# Altium PCB BLMC-26.PcbDoc (part 2 of 2)
Units mm, origin at the board's own origin, x right, y up, seen from the top; angles counter-clockwise.
Board outline 139.57 x 72.14 mm, 4 copper layers (Top Layer, GND, POWER, Bottom Layer), stack 0.603 mm thick; 168 components, 104 nets, 514 pads, 115 vias.
Unrouted connection lines stored in the file: 49.
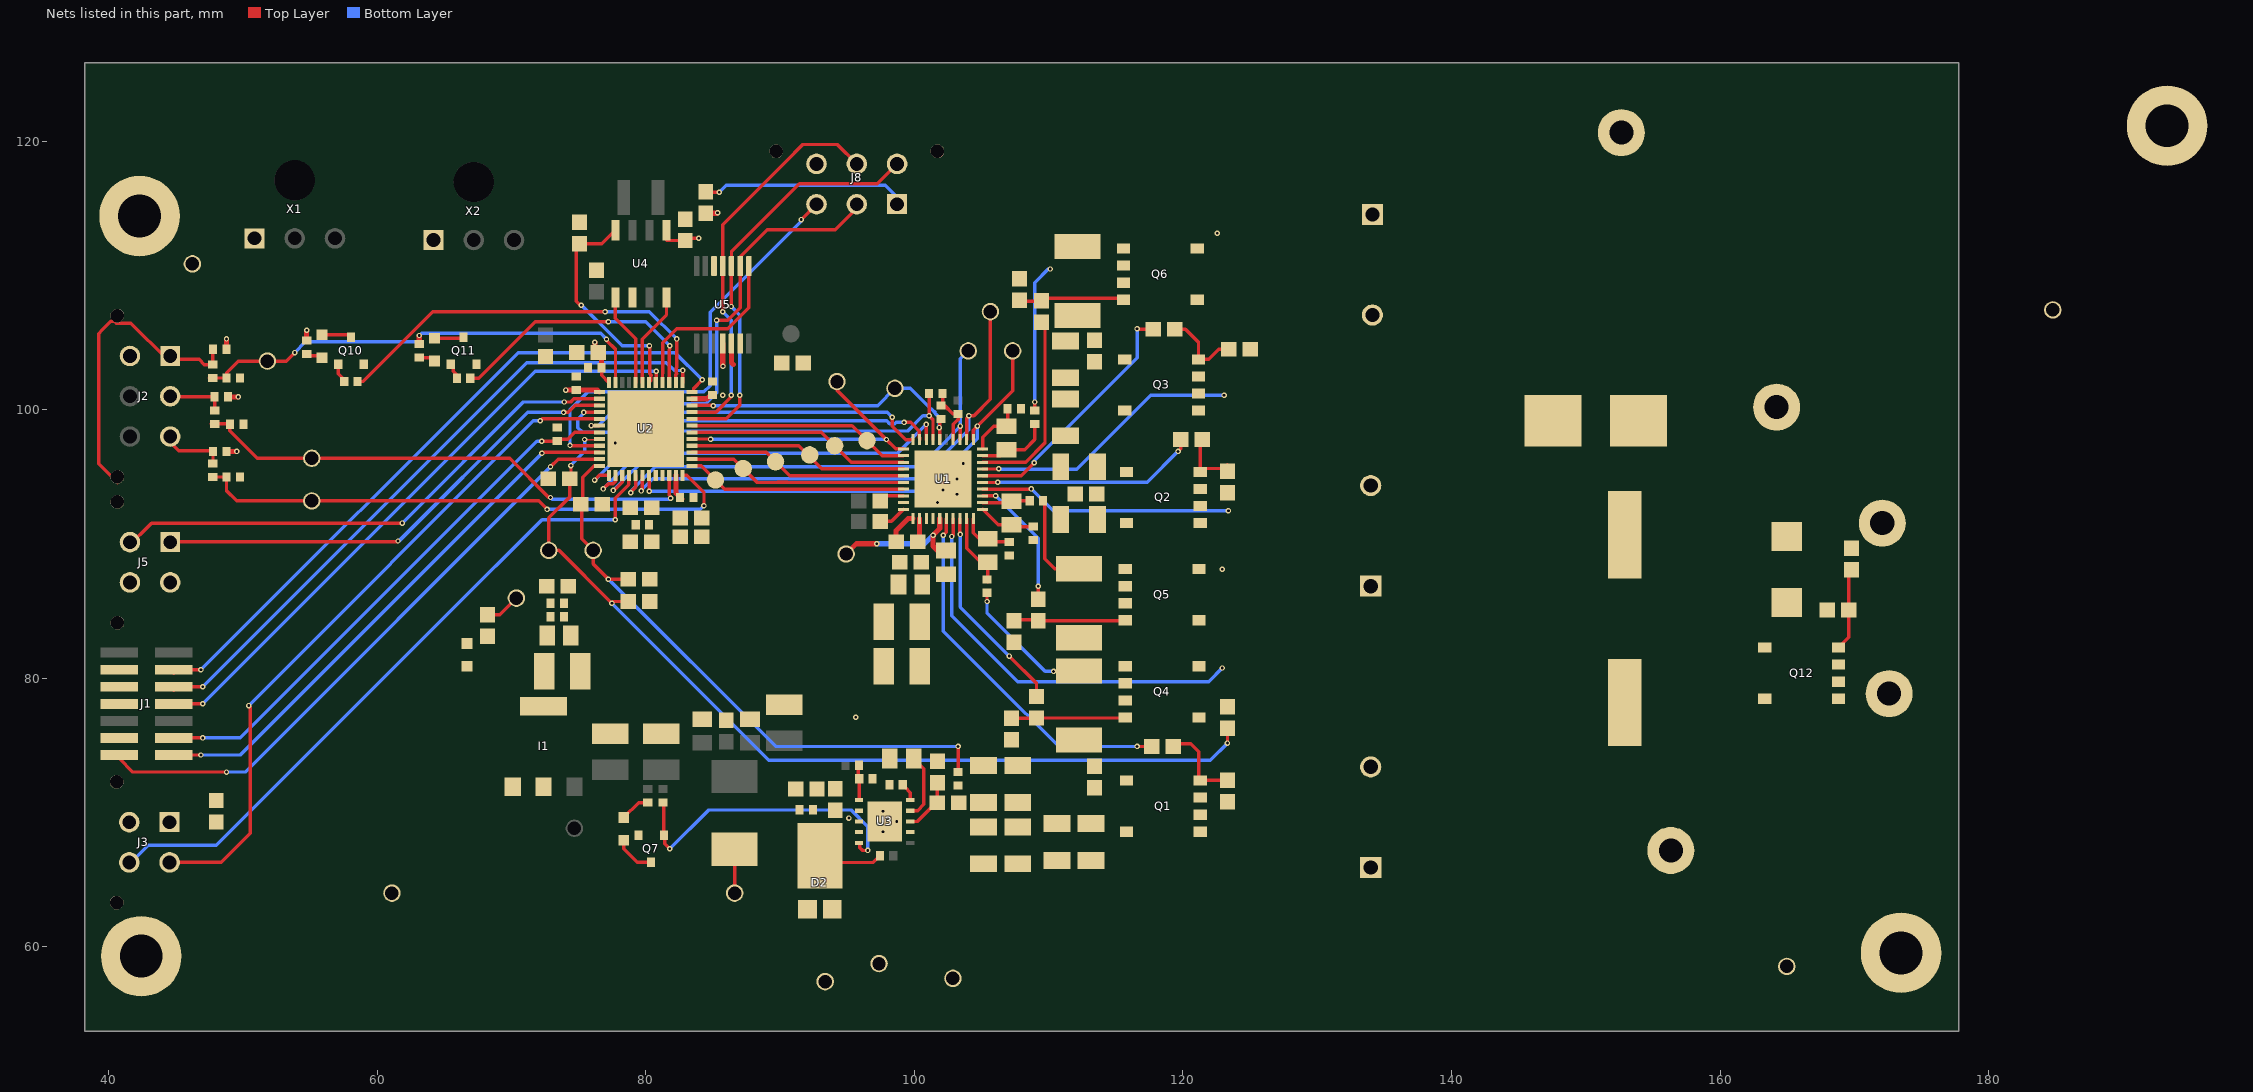
[diagram p4: the nets of this part, all layers, seen from the top]

## Via types
v1: diameter 0.406, hole 0.203, Top Layer to Bottom Layer, 115 vias

## Nets (pads, with @x,y where several pads share a name; then routed paths per layer and width w, separated by ;. In a path a pad name is that pad's centre, name@x,y a point inside that pad or via, vN(x,y) a via of type N, cw(c..) or ccw(c..) an arc to the next point about the centre after c; other vN are vias at no path point) (continued)
CLK: J8.2 U2.6 U5.2 | length 32.8
  Top Layer w0.254: v1(75.926,98.827) U2.6@76.536,98.827 ; v1(85.268,106.68) 86.106,106.68 87.025,107.599 U5.2@87.025,110.708 87.025,111.409 89.032,113.416 94.112,113.416 95.71,115.014 J8.2@95.71,115.316
  Bottom Layer w0.254: v1(75.926,98.827) 75.947,98.806 76.454,98.806 78.105,100.457 84.455,100.457 85.268,101.27 v1(85.268,106.68)
COMP_6: C43.2 R15.2 U3.7
CPH: C8.1 U1.2 | length 2.1
  Top Layer w0.382: C8.1@100.043,89.972 100.386,90.315 U1.2@100.386,91.895
CPL: C8.2 U1.1 | length 2.4
  Top Layer w0.382: C8.2@98.641,90.17 98.641,91.004 99.531,91.895 U1.1@99.885,91.895
CSN: U2.40 U5.1 | length 13.6
  Top Layer w0.254: U2.40@81.24,102.032 81.24,102.703 81.259,102.722 81.259,103.338 81.259,105.008 82.296,106.045 86.106,106.045 87.675,107.614 U5.1@87.675,110.708
DVDD: C3.2 U1.38 | length 1.9
  Top Layer w0.254: C3.2@97.454,93.075 97.97,93.591 U1.38@99.19,93.591
EN_6: R11.1 R13.2 TP2.1 U3.3 | length 4.1
  Top Layer w0.254: U3.3@99.69,69.342 100.203,69.342 R11.1@101.645,70.784 ; R11.1@101.689,70.739 101.689,72.187 R13.2@101.727,72.225
ENABLE: TP11.1 U1.31 U2.29 | length 21.9
  Top Layer w0.254: U2.29@83.444,97.827 84.799,97.827 v1@84.836,97.79 ; TP11.1@94.234,102.108 94.234,101.473 v1(97.917,97.79) 98.615,97.092 U1.31@99.19,97.092
  Bottom Layer w0.254: v1(84.817,97.809) 97.898,97.809 v1(97.917,97.79)
FB_6: R14.2 R17.1 TP4.1 U3.6 | length 2.6
  Top Layer w0.254: R14.2@95.877,73.533 95.824,73.48 95.824,72.58 95.887,72.517 R17.1@95.893,72.517 ; U3.6@95.89,70.942 R17.1@95.89,72.514
  other v1: 95.631,77.097
GND: C2.2 C4.2 C6.2 C7.2 C12.1 C13.1 C14.1 C15.1 C16.1 C17.1 C18.1 C19.1 C20.1 C21.1 C22.1 C23.2 C24.2 C25.2 C26.2 C27.2 C28.2 C29.2 C30.2 C31.2 C38.1 C39.1 C40.2 C41.2 C42.1 C43.1 C44.2 C46.2 C47.2 C48.2 C49.1 C50.2 C51.2 C52.2 C53.1 C54.1 C55.1 C56.1 C57.1 C58.1 C59.2 C60.2 C61.2 C62.2 C63.2 C64.2 C66.2 C67.1 C68.1 C69.1 D2.1 D3.2 D7.2 I1.1 J1.05 J1.07 J1.11 J2.4 J3.3 J5.2 J5.4 J8.6 pad.4 Q7.2 Q10.2 Q11.2 Q12.5 Q12.6 R4.1 R9.1 R13.1 R16.1 R17.2 R19.2 R24.2 R37.2 R39.2 R46.1 R47.2 R48.1 R49.2 R50.1 R52.2 R53.2 R54.2 TP8.1 TP27.1 TP28.1 TP29.1 U1.39 U1.41 U2.49 U3.8 U3.11 U4.2 U5.5 U5.13 X1.P$1 X2.P$1 | length 0.4
  Top Layer w0.254: v1(41.323,104.219) J2.4@41.577,103.965
  other v1: 97.663,68.58 98.679,69.342 95.123,69.596 97.663,70.104 101.727,93.091 103.169,93.71 102.136,94.034 103.169,94.853 103.632,96.012 77.724,97.536
HALLA_IN: J2.1 R40.1 R41.1 | length 22.7
  Top Layer w0.254: 40.552,106.461 40.637,106.461 41.652,106.461 J2.1@44.338,103.774 ; J2.1@40.637,106.584 40.552,106.584 40.163,106.584 39.528,105.949 39.243,105.664 39.243,95.978 J2.1@40.652,94.569 ; J2.1@44.577,104.013 44.831,103.759 46.736,103.759 47.125,103.37 R41.1@47.752,103.37 R40.1@47.752,104.293
HALLB_IN: J2.2 R42.1 R43.1 | length 5.1
  Top Layer w0.254: J2.2@44.577,101.013 44.577,101.521 44.751,100.965 R42.1@47.752,100.965 ; R43.1@47.879,99.941 R42.1@47.879,100.957
HALLC_IN: J2.3 R44.1 R45.1 | length 4.2
  Top Layer w0.254: J2.3@44.577,97.584 45.212,96.949 R44.1@47.633,96.949 ; R45.1@47.76,96.012 R44.1@47.76,96.901
INHA: pad.5@96.474,97.709 U1.32 U2.31 | length 16.7
  Top Layer w0.254: U2.31@83.444,98.827 95.356,98.827 pad.5@96.474,97.709 97.592,96.591 U1.32@99.19,96.591
INHB: pad.5@92.202,96.647 U1.34 U2.28 | length 16.5
  Top Layer w0.254: U2.28@83.444,97.327 91.395,97.327 93.115,95.607 99.173,95.607 U1.34@99.19,95.591
INHC: pad.5@87.249,95.631 U1.36 U2.26 | length 16.5
  Top Layer w0.254: U2.26@83.444,96.327 86.553,96.327 pad.5@87.249,95.631 88.289,94.591 89.792,94.591 89.806,94.605 90.534,94.605 90.548,94.591 U1.36@99.19,94.591
INLA: pad.5@94.062,97.327 U1.33 U2.30 | length 16.7
  Top Layer w0.254: U2.30@83.444,98.327 93.062,98.327 95.298,96.091 97.155,96.091 U1.33@99.19,96.091
INLB: pad.5@89.662,96.139 U1.35 U2.27 | length 16.5
  Top Layer w0.254: U2.27@83.444,96.827 83.826,96.827 88.974,96.827 pad.5@89.662,96.139 90.71,95.091 U1.35@99.19,95.091
INLC: pad.5@85.181,94.778 U1.37 U2.25 | length 16.5
  Top Layer w0.254: U2.25@83.444,95.827 84.132,95.827 pad.5@85.181,94.778 85.868,94.091 U1.37@99.19,94.091
MISO: J8.4 U2.32 U5.3 | length 30.7
  Top Layer w0.254: U2.32@83.444,99.327 85.992,99.327 86.995,100.33 v1(86.995,101.092) ; v1(86.36,107.696) U5.3@86.36,110.708 ; U5.3@86.375,110.708 86.375,111.775 91.44,116.84 92.964,116.84 97.234,116.84 98.524,118.13 J8.4@98.71,118.316
  Bottom Layer w0.254: v1(86.36,107.696) 86.995,107.061 v1(86.995,101.092)
MOSI: J8.5 U2.33 U5.4 | length 29.5
  Top Layer w0.254: U2.33@83.444,99.827 85.222,99.827 86.36,100.965 v1(86.36,101.092) ; v1(85.725,107.315) U5.4@85.725,110.708 85.725,113.792 90.424,118.491 91.694,119.761 94.265,119.761 J8.5@95.71,118.316
  Bottom Layer w0.254: v1(85.725,107.315) 86.36,106.68 v1(86.36,101.092)
MOTOR_A: pad.3@156.337,67.183 Q1.1 Q1.2 Q1.3 Q4.5 Q4.6 R30.2 U1.7 | length 29.9
  Top Layer w0.254: v1(102.788,90.568) 102.886,90.666 U1.7@102.886,91.895
  Bottom Layer w0.254: v1(102.788,90.568) 102.788,84.664 107.696,79.756 121.92,79.756 v1(122.936,80.772)
MOTOR_B: pad.3@164.211,100.203 Q2.1 Q2.2 Q2.3 Q5.5 Q5.6 R21.2 U1.14 | length 19
  Top Layer w0.254: U1.14@105.082,94.091 108.696,94.091 v1(108.712,94.107)
  Bottom Layer w0.254: v1(108.712,94.107) 110.334,92.485 v1(123.387,92.485)
  other v1: 122.936,88.138
MOTOR_C: pad.3@152.654,120.65 Q3.1 Q3.2 Q3.3 Q6.5 Q6.6 R23.2 U1.17 | length 20.3
  Top Layer w0.254: U1.17@105.082,95.591 106.259,95.591 v1(106.279,95.611) v1@106.299,95.631
  Bottom Layer w0.254: v1(106.279,95.611) 106.314,95.576 108.725,95.576 109.122,95.576 112.086,95.576 117.602,101.092 v1(123.063,101.092)
  other v1: 122.555,113.157
NetC9_1: C9.1 R33.1 U1.9 | length 5.7
  Top Layer w0.254: U1.9@103.886,91.895 103.886,89.691 104.929,88.648 C9.1@105.455,88.648 R33.1@105.455,87.182
NetC9_2: C9.2 R52.1 U1.10 | length 4
  Top Layer w0.254: U1.10@104.387,91.895 104.387,90.842 104.82,90.408 C9.2@105.455,90.408 105.687,90.176 R52.1@107.061,90.176
NetC10_1: C10.1 R34.1 U1.12 | length 3.6
  Top Layer w0.254: U1.12@105.082,93.091 107.131,93.091 C10.1@107.233,93.193 107.259,93.218 R34.1@108.593,93.218
NetC10_2: C10.2 R53.1 U1.11 | length 4.3
  Top Layer w0.254: U1.11@105.082,92.59 106.24,91.433 C10.2@107.233,91.433 107.361,91.305 108.384,91.305 R53.1@108.839,91.305
NetC11_1: C11.1 R35.1 U1.19 | length 5.5
  Top Layer w0.254: U1.19@105.082,96.591 106.414,96.591 C11.1@106.852,97.03 108.206,97.03 108.966,97.79 R35.1@108.966,98.941
NetC11_2: C11.2 R54.1 U1.20 | length 4.3
  Top Layer w0.254: U1.20@105.082,97.092 105.082,97.97 105.902,98.79 C11.2@106.852,98.79 106.942,98.879 R54.1@106.942,100.076
NetC30_1: C30.1 R3.1 R4.2 TP22.1 U2.12 | length 44.7
  Top Layer w0.254: C30.1@75.146,92.964 75.311,93.129 75.311,94.996 76.142,95.827 U2.12@76.536,95.827 ; C30.1@75.222,92.964 75.222,90.386 TP22.1@76.073,89.535 76.073,88.519 v1(77.216,87.376) R4.2@78.702,87.376 ; R3.1@103.251,73.017 v1(103.251,74.93)
  Bottom Layer w0.254: v1(77.216,87.376) 89.662,74.93 v1(103.251,74.93)
NetC31_1: C31.1 R19.1 R60.2 TP24.1 U2.8 | length 70.1
  Top Layer w0.102: v1(75.438,97.79) 76.498,97.79 U2.8@76.536,97.827
  Top Layer w0.254: v1(74.422,95.849) 74.422,94.958 C31.1@74.333,94.869 74.333,93.51 72.771,91.948 TP24.1@72.771,89.535 73.533,89.535 v1(77.47,85.598) 77.597,85.725 R60.2@78.448,85.725 ; v1(123.317,75.184) R19.1@123.317,76.289
  Bottom Layer w0.254: v1@74.404,95.867 75.438,96.901 v1(75.438,97.79) ; v1(77.47,85.598) 89.154,73.914 122.047,73.914 v1(123.317,75.184)
NetC44_1: C44.1 R15.1
NetC62_1: C62.1 R41.2 TP23.1 U2.47 | length 34.6
  Top Layer w0.254: R41.2@47.498,102.37 C62.1@48.776,102.37 48.776,102.751 49.657,103.632 TP23.1@51.816,103.632 53.213,103.632 v1(53.848,104.267) ; v1(77.068,105.262) 77.089,105.262 77.089,105.156 77.74,104.505 U2.47@77.74,102.032
  Bottom Layer w0.254: v1(53.848,104.267) 54.639,105.058 63.317,105.058 ; 63.317,105.693 76.637,105.693 v1(77.068,105.262)
NetC63_1: C63.1 R43.2 TP25.1 U2.22 | length 38.7
  Top Layer w0.254: R43.2@47.625,98.949 49.006,98.949 C63.1@49.006,98.909 ; C63.1@49.03,98.933 C63.1@49.006,98.909 ; v1(72.898,93.472) 72.771,93.472 69.85,96.393 TP25.1@55.118,96.393 51.054,96.393 49.006,98.441 C63.1@49.006,98.909 ; U2.22@81.74,95.123 81.74,93.647 81.904,93.483 v1(81.839,93.418)
  Bottom Layer w0.254: v1(72.898,93.472) 73.025,93.345 81.788,93.345 81.85,93.407 v1(81.839,93.418)
NetC64_1: C64.1 R45.2 TP26.1 U2.24 | length 41.4
  Top Layer w0.254: R45.2@47.625,95.004 47.633,94.996 48.514,94.996 48.768,94.742 48.768,93.98 49.53,93.218 TP26.1@55.118,93.218 72.009,93.218 v1(72.644,92.583) ; U2.24@82.74,95.123 83.058,95.123 84.328,93.853 v1(84.328,92.85)
  Bottom Layer w0.254: v1(72.644,92.583) 84.061,92.583 v1(84.328,92.85)
NetD1_1: D1.1 R10.2 | length 2.2
  Top Layer w0.254: D1.1@78.359,69.647 79.459,70.747 R10.2@80.137,70.747
NetD1_2: D1.2 Q7.3 | length 3.1
  Top Layer w0.254: D1.2@78.359,67.945 78.359,67.31 79.359,66.31 Q7.3@80.391,66.31
NetD3_1: D3.1 R18.2
NetD5_1: D5.1 R28.1 | length 1.1
  Top Layer w0.254: R28.1@54.864,104.148 54.974,104.038 55.728,104.038 D5.1@55.88,103.886
NetD5_2: D5.2 Q10.3 | length 2.2
  Top Layer w0.254: D5.2@55.88,105.588 57.845,105.588 Q10.3@58.039,105.394
NetD6_1: D6.1 R29.1 | length 1.3
  Top Layer w0.254: R29.1@63.119,103.894 64,103.894 D6.1@64.262,103.632
NetD6_2: D6.2 Q11.3 | length 2.2
  Top Layer w0.254: D6.2@64.135,105.334 Q11.3@66.227,105.334 ; D6.2@64.322,105.207 D6.2@64.389,105.14
NetF2_2: F2.2 J3.1
NetF3_2: F3.2 J8.1 | length 15.4
  Top Layer w0.254: F3.2@84.455,116.243 84.493,116.205 v1(85.471,116.205)
  Bottom Layer w0.254: v1(85.471,116.205) 85.979,116.713 87.657,116.713 89.662,116.713 97.814,116.713 98.71,115.817 J8.1@98.71,115.316
NetJ3_2: J3.2 U2.5 | length 51.3
  Top Layer w0.254: J3.2@44.656,66.342 44.704,66.294 48.387,66.294 50.546,68.453 50.546,77.851 v1(50.419,77.978) ; v1(72.136,99.187) 72.276,99.327 U2.5@76.536,99.327
  Bottom Layer w0.254: v1(50.419,77.978) 71.628,99.187 v1(72.136,99.187)
NetJ3_4: J3.4 U2.16 | length 50.3
  Top Layer w0.254: v1(77.724,91.821) 77.724,93.421 78.74,94.437 U2.16@78.74,95.123
  Bottom Layer w0.254: J3.4@41.656,66.342 41.704,66.342 42.926,67.564 48.006,67.564 64.799,84.357 65.249,84.807 72.263,91.821 v1(77.724,91.821)
NetJ4_1: pad.2 Q12.1 Q12.2 Q12.3
NetJ5_1: J5.1 U2.3 | length 36.5
  Top Layer w0.254: J5.1@44.402,89.789 44.783,90.17 61.479,90.17 v1(61.542,90.232) ; v1(73.873,99.806) 74.216,99.806 74.737,100.327 U2.3@76.536,100.327
  Bottom Layer w0.254: v1(61.542,90.232) 61.615,90.232 71.188,99.806 v1(73.873,99.806)
NetJ5_3: J5.3 U2.2 | length 39.7
  Top Layer w0.254: J5.3@41.402,89.789 43.18,91.567 v1(61.849,91.567) ; v1(73.914,100.584) 74.401,100.584 74.642,100.825 75.121,100.825 75.123,100.827 U2.2@76.536,100.827
  Bottom Layer w0.254: v1(61.849,91.567) 70.866,100.584 v1(73.914,100.584)
NetJ8_3: J8.3 U2.9 | length 32.8
  Top Layer w0.254: v1(74.351,97.353) 74.377,97.327 75.224,97.327 75.24,97.311 75.636,97.311 75.652,97.327 U2.9@76.536,97.327 ; v1(91.567,114.173) J8.3@92.71,115.316
  Bottom Layer w0.254: v1(74.351,97.353) 74.351,100.005 74.705,100.359 75.692,101.346 84.328,101.346 84.789,101.807 84.789,104.09 84.789,106.482 84.789,107.268 91.567,114.046 v1(91.567,114.173)
NetQ1_4: Q1.4 R6.1 R30.1 | length 6.2
  Top Layer w0.254: R6.1@119.291,75.127 120.58,75.127 121.175,74.532 Q1.4@121.175,72.5 ; Q1.4@121.285,72.39 121.323,72.428 R30.1@123.317,72.428
NetQ2_4: Q2.4 R7.1 R21.1 | length 4.7
  Top Layer w0.254: R7.1@121.45,97.79 121.285,97.625 121.285,95.923 Q2.4@121.285,95.377 121.539,95.631 123.025,95.631 R21.1@123.317,95.923
NetQ3_4: Q3.4 R8.1 R23.1 | length 6
  Top Layer w0.254: R8.1@119.399,105.998 120.189,105.998 121.158,105.029 Q3.4@121.158,103.759 121.92,103.759 122.682,104.521 R23.1@123.406,104.521
NetQ4_1: Q4.1 Q4.2 Q4.3 R33.2 R46.2 | length 8.3
  Top Layer w0.254: v1(105.41,85.725) R33.2@105.41,86.376
  Bottom Layer w0.254: v1(105.41,85.725) 105.41,84.836 109.728,80.518 v1(110.363,80.518)
NetQ4_4: Q4.4 R31.1 R37.1 | length 8.5
  Top Layer w0.254: R37.1@107.233,77.039 109.081,77.039 R31.1@109.093,77.051 115.658,77.051 Q4.4@115.696,77.089
NetQ5_1: Q5.1 Q5.2 Q5.3 R34.2 R48.2 | length 7.2
  Top Layer w0.254: R34.2@109.593,93.218 109.711,93.1 109.711,88.904 110.452,88.163 R48.2@112.268,88.163
NetQ5_4: Q5.4 R32.1 R47.1 | length 8.4
  Top Layer w0.254: R47.1@107.315,84.366 109.144,84.366 R32.1@109.22,84.29 115.658,84.29 Q5.4@115.696,84.328
NetQ6_1: Q6.1 Q6.2 Q6.3 R35.2 R50.2 | length 11.1
  Top Layer w0.254: R35.2@108.966,99.941 v1(108.966,100.584)
  Bottom Layer w0.254: v1(108.966,100.584) 108.966,109.474 109.982,110.49 v1(110.109,110.49)
NetQ6_4: Q6.4 R36.1 R49.1 | length 7.9
  Top Layer w0.254: R49.1@107.823,108.078 R36.1@109.474,108.078 ; R36.1@109.474,108.115 109.674,108.315 115.458,108.315 Q6.4@115.569,108.204
NetQ10_1: Q10.1 R25.1 | length 1.3
  Top Layer w0.254: Q10.1@57.089,103.394 57.089,102.685 R25.1@57.539,102.235
NetQ11_1: Q11.1 R26.1 | length 1.1
  Top Layer w0.254: Q11.1@65.471,103.267 65.659,103.079 65.659,102.87 65.921,102.608 R26.1@65.921,102.362
NetR6_2: R6.2 U1.6 | length 27.7
  Top Layer w0.254: v1(102.153,90.662) 102.386,90.894 U1.6@102.386,91.895 ; v1(116.586,74.93) R6.2@117.691,74.93
  Bottom Layer w0.254: v1(102.153,90.662) 102.153,83.521 105.918,79.756 110.744,74.93 v1(116.586,74.93) v1@116.755,74.93
NetR7_2: R7.2 U1.15 | length 16.5
  Top Layer w0.254: U1.15@105.082,94.591 106.21,94.591 v1(106.217,94.599) ; v1(119.634,96.901) 119.85,97.117 R7.2@119.85,97.79
  Bottom Layer w0.254: v1(106.217,94.599) 117.332,94.599 v1(119.634,96.901)
NetR8_2: R8.2 U1.16 | length 18.7
  Top Layer w0.254: U1.16@105.082,95.091 107.96,95.091 v1(108.923,96.055) ; v1(116.586,106.045) 116.633,105.998 R8.2@117.799,105.998
  Bottom Layer w0.254: v1(108.923,96.055) 108.839,96.139 116.586,103.886 v1(116.586,106.045)
NetR25_2: R25.2 U2.38 | length 30.1
  Top Layer w0.254: R25.2@58.539,102.108 58.928,102.108 64.135,107.315 v1(76.962,107.315) ; U2.38@82.24,102.032 82.24,102.629 82.296,102.685 82.296,102.7 82.261,102.735 82.261,103.131 82.296,103.166 v1(82.296,105.283)
  Bottom Layer w0.254: v1(76.962,107.315) 80.264,107.315 v1(82.296,105.283)
NetR26_2: R26.2 U2.39 | length 20.1
  Top Layer w0.254: R26.2@66.921,102.362 67.558,102.362 71.749,106.553 v1(77.216,106.553) ; U2.39@81.74,102.032 81.74,104.473 81.775,104.508 81.788,104.521 v1(81.788,104.775)
  Bottom Layer w0.254: v1(77.216,106.553) 77.224,106.561 80.002,106.561 v1(81.788,104.775)
NetR31_2: R31.2 U1.8 | length 15.6
  Top Layer w0.254: U1.8@103.386,91.895 103.386,90.719 v1(103.408,90.719) ; v1(107.061,81.661) 109.093,79.629 R31.2@109.093,78.651
  Bottom Layer w0.254: v1(103.408,90.719) 103.408,85.314 v1(107.061,81.661)
NetR32_2: R32.2 U1.13 | length 10
  Top Layer w0.254: U1.13@105.082,93.591 106.037,93.591 v1(106.045,93.599) ; R32.2@109.22,85.89 v1(109.22,86.868)
  Bottom Layer w0.254: v1(106.045,93.599) 109.22,90.424 v1(109.22,86.868)
NetR36_2: R36.2 U1.18 | length 14.3
  Top Layer w0.254: U1.18@105.082,96.091 108.283,96.091 109.728,97.536 109.728,99.476 109.728,106.261 R36.2@109.474,106.515
NFAULT: R2.1 TP10.1 U1.26 U2.34 | length 22.1
  Top Layer w0.254: U2.34@83.444,100.327 84.966,100.327 85.006,100.287 v1(85.024,100.306) ; U1.26@101.886,97.787 101.886,99.1 R2.1@101.981,99.195
  Bottom Layer w0.254: v1(85.024,100.306) 97.258,100.306 TP10.1@98.552,101.6 99.695,101.6 101.248,100.047 101.29,100.047 101.571,99.766 101.571,99.724 101.854,99.441 v1(101.854,98.679)
NRST: C19.2 J1.12 U2.7 | length 41.2
  Top Layer w0.254: J1.12@44.834,75.311 45.088,75.565 v1(46.99,75.565) ; v1(72.247,97.671) C19.2@73.406,97.671 ; C19.2@73.406,97.798 74.176,97.798 74.705,98.327 U2.7@76.536,98.327
  Bottom Layer w0.254: v1(46.99,75.565) 49.784,75.565 71.89,97.671 v1(72.247,97.671)
NSCS: U1.30 U2.4 | length 29.4
  Top Layer w0.254: v1(75.383,99.806) 75.399,99.822 75.438,99.822 U2.4@76.53,99.822 ; v1(98.343,99.446) 98.343,98.79 99.346,97.787 U1.30@99.885,97.787
  Bottom Layer w0.254: v1(75.383,99.806) 75.402,99.786 74.93,99.314 74.93,98.679 75.282,98.327 78.134,98.327 79.629,99.822 97.968,99.822 v1(98.343,99.446)
PGOOD_6: Q7.1 R12.1 U3.10 | length 22.9
  Top Layer w0.254: R12.1@81.331,70.747 81.331,68.32 Q7.1@81.341,68.31 ; Q7.1@81.386,68.073 Q7.1@81.411,68.073 ; Q7.1@81.411,68.33 Q7.1@81.411,68.073 ; v1(81.788,67.31) 81.411,67.687 Q7.1@81.411,68.073 ; U3.10@95.89,67.742 95.921,67.711 95.921,67.401 96.139,67.183 v1(96.52,67.183)
  Bottom Layer w0.254: v1(81.788,67.31) 84.674,70.196 95.285,70.196 96.52,68.961 v1(96.52,67.183)
REV_G: Q12.4 R38.2 R39.1 | length 6.2
  Top Layer w0.254: Q12.4@168.817,82.296 169.583,83.062 R39.1@169.583,85.09 169.583,87.884 R38.2@169.799,88.1
RT-CLK_6: R16.2 U3.5 | length 1.1
  Top Layer w0.254: R16.2@99.306,71.882 99.69,71.498 U3.5@99.69,70.942
RXD: U2.43 U4.4 | length 7.1
  Top Layer w0.254: U2.43@79.74,102.032 79.74,105.267 81.534,107.061 U4.4@81.534,108.371
SCLK: U1.29 U2.13 | length 28.3
  Top Layer w0.254: v1(76.18,94.767) 76.536,95.123 U2.13@77.24,95.123 ; v1(99.232,99.065) 99.719,99.065 100.368,98.416 100.368,97.93 100.386,97.912 U1.29@100.386,97.787
  Bottom Layer w0.254: v1(76.18,94.767) 80.6,99.187 97.926,99.187 98.145,98.968 98.542,98.968 98.639,99.065 v1(99.232,99.065)
SDI: U1.28 U2.15 | length 27.9
  Top Layer w0.254: v1(77.576,94.001) 77.597,93.98 78.232,94.615 78.232,95.115 U2.15@78.24,95.123 ; v1(100.883,98.917) 100.883,97.79 U1.28@100.886,97.787
  Bottom Layer w0.254: v1(77.576,94.001) 77.873,94.297 80.349,96.774 98.741,96.774 v1(100.883,98.917)
SDO: R1.1 U1.27 U2.14 | length 31.7
  Top Layer w0.254: v1(76.835,94.107) 77.216,94.488 77.558,94.488 77.633,94.562 77.633,94.579 77.752,94.698 U2.14@77.752,95.111 ; R1.1@101.1,101.219 101.092,101.211 v1(101.092,99.568) 101.386,99.274 U1.27@101.386,97.787
  Bottom Layer w0.254: v1(76.835,94.107) 81.153,98.425 99.494,98.425 100.637,99.568 v1(101.092,99.568)
SOA: TP12.1 U1.23 U2.17 | length 35
  Top Layer w0.254: v1(78.867,93.824) 78.867,93.882 79.24,94.255 U2.17@79.24,95.123 ; U1.23@103.386,97.787 103.423,97.824 v1(103.423,98.79)
  Bottom Layer w0.254: v1(78.867,93.824) 78.867,93.938 80.687,95.758 100.473,95.758 v1(103.423,98.79) 103.423,103.804 TP12.1@104.013,104.394
SOB: TP13.1 U1.22 U2.18 | length 38.8
  Top Layer w0.254: v1(79.65,93.959) 79.629,93.98 79.74,94.091 U2.18@79.74,95.123 ; U1.22@103.886,97.787 103.886,98.576 103.902,98.592 103.902,98.988 103.886,99.004 103.886,99.38 v1(104.058,99.552) 104.439,99.552 105.664,100.776 TP13.1@105.664,107.061
  Bottom Layer w0.254: v1(79.65,93.959) 79.629,93.98 80.518,94.869 100.403,94.869 104.058,98.524 v1(104.058,99.552)
SOC: TP14.1 U1.21 U2.19 | length 36
  Top Layer w0.254: U2.19@80.24,95.123 80.24,93.944 v1(80.255,93.929) ; U1.21@104.387,97.787 104.387,98.483 v1(104.693,98.79) 107.315,101.411 TP14.1@107.315,104.394
  Bottom Layer w0.254: v1(80.255,93.929) 81.441,93.929 81.463,93.951 81.859,93.951 81.881,93.929 100.764,93.929 101.209,94.374 101.489,94.655 104.693,97.859 v1(104.693,98.79)
SS-TR_6: C42.2 U3.4 | length 5
  Top Layer w0.254: U3.4@99.69,70.142 100.241,70.142 100.711,70.612 100.711,73.27 C42.2@99.94,74.041
STB: R24.1 U2.42 U4.8 | length 17.3
  Top Layer w0.254: v1(75.184,107.794) 75.135,107.745 74.803,108.077 74.803,112.103 R24.1@75.057,112.357 76.71,112.357 U4.8@77.724,113.371 ; U2.42@80.24,102.032 80.359,102.151 80.359,102.533 80.391,102.565 80.391,102.574 80.293,102.672 80.293,104.746 v1(80.264,104.775)
  Bottom Layer w0.254: v1(75.184,107.794) 75.184,107.696 75.311,107.696 77.266,105.741 78.232,104.775 v1(80.264,104.775)
STLINK_RX: J1.13 U2.11 | length 45.8
  Top Layer w0.254: J1.13@40.764,74.041 41.78,73.025 v1(48.768,73.025) ; v1(72.898,95.758) 73.467,96.327 U2.11@76.536,96.327
  Bottom Layer w0.254: v1(48.768,73.025) 50.165,73.025 v1(72.898,95.758)
STLINK_TX: J1.14 U2.10 | length 41
  Top Layer w0.254: J1.14@44.834,74.295 v1(46.863,74.295) ; v1(72.263,96.774) 72.316,96.827 U2.10@76.536,96.827
  Bottom Layer w0.254: v1(46.863,74.295) 49.784,74.295 v1(72.263,96.774)
SW_6: C37.2 D2.2 L1.1 TP3.1 U3.9 | length 7.9
  Top Layer w0.254: TP3.1@86.614,64.008 L1.1@86.614,67.259 ; D2.2@93.218,66.785 93.718,66.285 96.908,66.285 C37.2@97.425,66.802
SWCLK: J1.06 U2.37 | length 49.1
  Top Layer w0.254: J1.06@44.834,79.121 45.088,79.375 v1(46.99,79.375) ; U2.37@82.74,102.032 v1(82.74,102.933)
  Bottom Layer w0.254: v1(46.99,79.375) 71.12,103.505 81.534,103.505 82.106,102.933 v1(82.74,102.933)
SWDIO: J1.04 U2.36 | length 51.4
  Top Layer w0.254: J1.04@44.834,80.391 45.088,80.645 v1(46.863,80.645) ; U2.36@83.444,101.327 83.547,101.327 83.547,101.581 v1(84.201,102.235)
  Bottom Layer w0.254: v1(46.863,80.645) 70.485,104.267 82.169,104.267 v1(84.201,102.235)
SWO: J1.08 U2.41 | length 47.2
  Top Layer w0.254: J1.08@44.834,77.851 45.088,78.105 v1(46.99,78.105) ; U2.41@80.74,102.032 80.772,102.064 v1(80.772,102.87)
  Bottom Layer w0.254: v1(46.99,78.105) 71.755,102.87 v1(80.772,102.87)
TXD: U2.44 U4.1 | length 7
  Top Layer w0.254: U4.1@77.724,108.371 77.724,106.807 79.24,105.291 U2.44@79.24,102.032
VBAT: C12.2 C13.2 C14.2 C15.2 C16.2 C17.2 C18.2 C20.2 C21.2 C22.2 C29.1 C49.2 C53.2 C54.2 C55.2 C56.2 C57.2 F2.1 F3.1 I1.2 I1.4 J1.03 R18.1 R28.2 R29.2 R40.2 R42.2 R44.2 R60.1 TP6.1 U2.1 U2.20 U2.21 U2.23 U2.35 U2.48 U4.5 U5.11 U5.12 | length 22.8
  Top Layer w0.254: R18.1@68.199,84.747 69.126,84.747 TP6.1@70.358,85.979 ; C14.2@76.7,103.124 76.7,102.572 U2.48@77.24,102.032 ; 81.534,112.609 82.929,112.609 C29.1@82.931,112.611 83.096,112.776 v1(83.947,112.776)
  Top Layer w0.382: R44.2@48.76,96.901 v1(49.53,96.901) ; R40.2@48.76,104.521 48.768,104.529 v1(48.768,105.283) ; R42.2@48.887,100.965 v1(49.649,100.965) ; R28.2@54.737,105.148 v1(54.737,105.918) ; R29.2@63.119,104.894 v1(63.119,105.537) ; v1(74.041,101.473) 74.049,101.481 C22.2@74.803,101.481 76.382,101.481 U2.1@76.536,101.327 ; v1(76.2,105.029) 76.2,104.541 76.208,104.533 76.208,104.513 C15.2@76.454,104.267 76.7,104.021 C14.2@76.7,103.124 ; U2.35@83.444,100.827 84.56,100.827 84.833,101.1 C13.2@84.963,101.1 C13.2@85.09,101.1 ; F3.1@84.455,114.643 85.306,114.643 v1(85.344,114.681) ; U5.11@85.725,104.938 85.725,103.251 v1(85.746,103.251) ; U5.12@86.375,104.938 86.375,103.52 86.517,103.378
  Top Layer w0.39: U2.23@82.24,95.123 82.24,93.79 C12.2@82.558,93.472 C12.2@82.677,93.353
  other v1: 85.725,101.092
VBATT: C58.2 D7.1 F1.1 pad.3@172.085,91.567 R38.1 TP7.1
VBATT_FUSED: C1.2 C2.1 C4.1 C6.1 C7.1 C25.1 C26.1 C38.2 C39.2 C46.1 C47.1 C48.1 C50.1 C52.1 C59.1 C60.1 C61.1 C66.1 C67.2 C68.2 C69.2 F1.2 Q1.5 Q1.6 Q2.5 Q2.6 Q3.5 Q3.6 R3.2 R11.2 U1.3 U1.4 U3.2
VCP: C1.1 TP9.1 U1.5 | length 10.5
  Top Layer w0.382: TP9.1@94.914,89.265 95.676,90.027 96.057,90.027 v1(97.2,90.027) ; U1.5@101.886,91.895 101.886,91.156 v1(101.391,90.662) 101.391,89.862 101.981,89.272 C1.1@102.362,89.272
  Bottom Layer w0.382: v1(97.2,90.027) 100.756,90.027 v1(101.391,90.662)
VGLS: C45.1 U1.40 | length 2.1
  Top Layer w0.254: C45.1@97.447,91.694 98.293,91.694 U1.40@99.19,92.59
VREF: C5.2 R1.2 R2.2 U1.24 | length 4.5
  Top Layer w0.254: R2.2@101.981,100.322 102.243,100.322 102.862,99.703 C5.2@103.251,99.703 103.251,99.268 103.225,99.268 102.886,98.929 U1.24@102.886,97.787 ; R2.2@102.1,100.314 R1.2@102.1,101.219
pads on no net: J1.01 J1.02 J1.09 J1.10 J2.6 U2.45 U5.6 U5.7 U5.8 U5.9 U5.10 U5.14 X1.1 X2.1

## Polygon pours and split planes (outlines as drawn)
VBATT_FUSED on Top Layer "VBATT_FUSED_L01_P023" (solid, pour order 23): 132.154,108.357 133.593,109.796 145.805,109.796 149.803,106.018 149.803,94.939 146.361,91.497 133.644,91.542 132.154,92.975
VBATT on Top Layer "VBATT_L01_P025" (solid, pour order 25): 151.638,101.219 151.638,87.503 162.293,87.363 163.957,89.027 173.352,89.027 174.11,89.535 174.11,93.436 173.538,94.107 158.75,94.107 156.158,96.699 156.158,101.219
NetJ4_1 on Top Layer "NETJ4_1_L01_P026" (solid, pour order 26): 176.247,76.944 176.28,81.785 175.758,82.227 170.781,82.255 169.729,81.534 168.288,81.534 168.288,76.822 168.783,76.327 175.691,76.327
VBAT on Top Layer "VBAT_L01_P057" (solid, pour order 57): 70.612,77.216 69.342,78.486 69.342,86.741 70.612,88.011 73.279,88.011 73.279,78.232 72.263,77.216
VBAT on Top Layer "VBAT_L01_P056" (solid, pour order 56): 80.613,93.218 79.883,93.218 79.883,89.662 80.01,89.535 82.931,89.535 83.185,89.789 83.185,92.456 82.042,92.456 81.362,93.136 81.362,95.504 80.613,95.504
5V_BUCK on Top Layer "5V_BUCK_L01_P055" (solid, pour order 55): 91.567,76.073 91.313,75.819 84.328,75.819 82.423,73.914 75.946,73.914 74.041,72.009 74.041,71.374 78.74,71.374 88.392,71.374 91.567,74.549 91.567,75.819
SW_6 on Top Layer "SW_6_L01_P054" (solid, pour order 54): 96.201,68.717 95.278,68.717 94.727,69.268 94.675,69.215 85.344,69.215 85.344,69.204 84.946,68.806 84.963,68.79 84.963,66.04 89.662,66.04 91.313,64.389 94.615,64.389 94.615,67.437 95.504,68.326 96.139,68.326
VBATT_FUSED on Top Layer "VBATT_FUSED_L01_P052" (solid, pour order 52): 119.38,104.902 119.693,104.589 119.693,100.008 118.49,98.805 118.49,91.1 118.157,90.767 118.119,90.805 113.03,90.805 113.03,99.441 112.141,100.33 110.236,100.33 110.236,102.997 110.617,103.378 114.439,103.378 115.824,104.902 116.649,104.902 118.618,104.902
VBATT_FUSED on Top Layer "VBATT_FUSED_L01_P051" (solid, pour order 51): 119.507,72.517 119.888,72.263 119.888,68.48 119.607,68.199 99.568,68.199 99.387,68.38 99.387,68.653 99.548,68.814 102.241,68.813 102.743,69.333 102.743,71.12 108.331,71.12 109.728,72.517
NetQ4_1 on Top Layer "NETQ4_1_L01_P007" (solid, pour order 7): 110.363,81.788 115.951,81.788 116.191,81.53 116.193,78.25 115.977,77.978 110.363,77.978 110.094,78.247 110.094,81.519
NetQ5_1 on Top Layer "NETQ5_1_L01_P034" (solid, pour order 34): 110.325,89.613 115.98,89.613 116.206,89.37 116.209,85.47 115.978,85.179 110.364,85.179 110.11,85.433 110.11,89.399
MOTOR_A on Top Layer "MOTOR_A_L01_P049" (solid, pour order 49): 117.161,76.638 117.586,76.213 117.7,76.327 121.412,76.327 122.047,76.962 122.047,79.121 122.682,79.756 124.206,79.756 124.714,79.248 124.714,71.755 124.46,71.501 120.65,71.501 120.65,68.199 121.666,67.183 126.111,67.183 127.254,68.326 127.254,68.935 127.254,80.264 124.968,82.55 118.104,82.55 117.161,81.607
MOTOR_B on Top Layer "MOTOR_B_L01_P047" (solid, pour order 47): 120.777,89.789 120.434,89.446 117.645,89.446 117.094,88.895 117.094,83.312 117.348,83.058 124.841,83.058 126.111,84.328 126.111,93.726 125.476,94.361 120.777,94.361 125.476,94.361 120.777,94.361
MOTOR_C on Top Layer "MOTOR_C_L01_P046" (solid, pour order 46): 116.967,113.411 117.856,114.3 125.603,114.3 126.746,113.157 126.746,99.441 126.454,99.149 120.582,99.149 120.582,102.675 121.031,103.124 123.698,103.124 124.333,103.759 124.333,106.045 123.317,107.061 117.726,107.061 116.967,107.82
NetQ6_1 on Top Layer "NETQ6_1_L01_P044" (solid, pour order 44): 116.078,109.093 116.052,109.119 116.052,113.437 115.316,114.173 110.109,114.173 109.601,113.665 109.601,109.601 110.109,109.093
GND on Top Layer "NONET_L01_P043" (solid, shelved, pour order 43): 38.1,117.729 39.116,118.745 176.685,118.745 177.673,117.757 177.673,56.261 176.784,55.372 39.243,55.372 38.1,56.515
VBATT_FUSED on POWER "NONET_L03_P040" (solid, shelved, pour order 40): 93.091,55.372 93.091,118.745 176.685,118.745 177.673,117.757 177.673,56.261 176.784,55.372
VBAT on POWER "NONET_L03_P041" (solid, shelved, pour order 41): 38.1,117.729 39.116,118.491 39.37,118.491 92.837,118.491 92.837,57.404 90.932,55.499 38.862,55.499 38.1,56.261
VBATT on POWER "NONET_L03_P039" (solid, shelved, pour order 39): 152.146,91.948 145.542,85.09 145.415,84.963 145.415,73.406 177.419,73.406 177.419,118.364 152.146,118.364 177.546,118.364 152.146,118.364
GND on GND "NONET_L02_P042" (solid, shelved, pour order 42): 38.227,117.729 38.989,118.491 176.748,118.491 177.438,117.8 177.438,56.153 176.911,55.626 38.989,55.626 38.227,56.388
MOTOR_C on Bottom Layer "MOTOR_C_L04_P058" (solid, pour order 58): 117.247,107.823 118.009,107.061 126.746,107.061 126.746,110.729 131.066,115.79 154.605,115.777 156.071,117.576 156.099,124.19 154.686,125.603 126.738,125.603 117.247,115.798

## Silkscreen, mask and mechanical layers (free items; w line width, h text height)
Top Overlay:
  the board outline again, w0.254

## Text inside footprints (layer, text, board x,y; h text height)
Q1: Top Overlay "*" at 123.125,69.215 h1.27 r180; Mechanical 13 "*" at 123.125,69.215 h1.27 r180; Bottom Overlay "*" at 123.125,69.215 h1.27 r180
Q2: Top Overlay "*" at 123.125,92.202 h1.27 r180; Mechanical 13 "*" at 123.125,92.202 h1.27 r180; Bottom Overlay "*" at 123.125,92.202 h1.27 r180
Q3: Top Overlay "*" at 122.998,100.584 h1.27 r180; Mechanical 13 "*" at 122.998,100.584 h1.27 r180; Bottom Overlay "*" at 122.998,100.584 h1.27 r180
Q4: Top Overlay "*" at 113.855,80.264 h1.27; Mechanical 13 "*" at 113.855,80.264 h1.27; Bottom Overlay "*" at 113.855,80.264 h1.27
Q5: Top Overlay "*" at 113.855,87.503 h1.27; Mechanical 13 "*" at 113.855,87.503 h1.27; Bottom Overlay "*" at 113.855,87.503 h1.27
Q6: Top Overlay "*" at 113.728,111.379 h1.27; Mechanical 13 "*" at 113.728,111.379 h1.27; Bottom Overlay "*" at 113.728,111.379 h1.27
Q12: Top Overlay "*" at 170.657,79.121 h1.27 r180; Mechanical 13 "*" at 170.657,79.121 h1.27 r180; Bottom Overlay "*" at 170.657,79.121 h1.27 r180
U1: Top Overlay "*" at 98.597,98.028 h0.76 r90; Mechanical 13 "*" at 100.27,91.983 h1.27 r90
U2: Top Overlay "*" at 75.438,101.854 h0.76; Mechanical 13 "*" at 76.625,100.942 h1.27